# Altium PCB Conzult.PcbDoc
Units mil, origin at the board's own origin, x right, y up, seen from the top; angles counter-clockwise.
Board outline 2500 x 1062.99 mil, 2 copper layers ([1] Top Layer, [4] Bottom), stack 62.4 mil thick; 45 components, 27 nets, 158 pads, 38 vias.
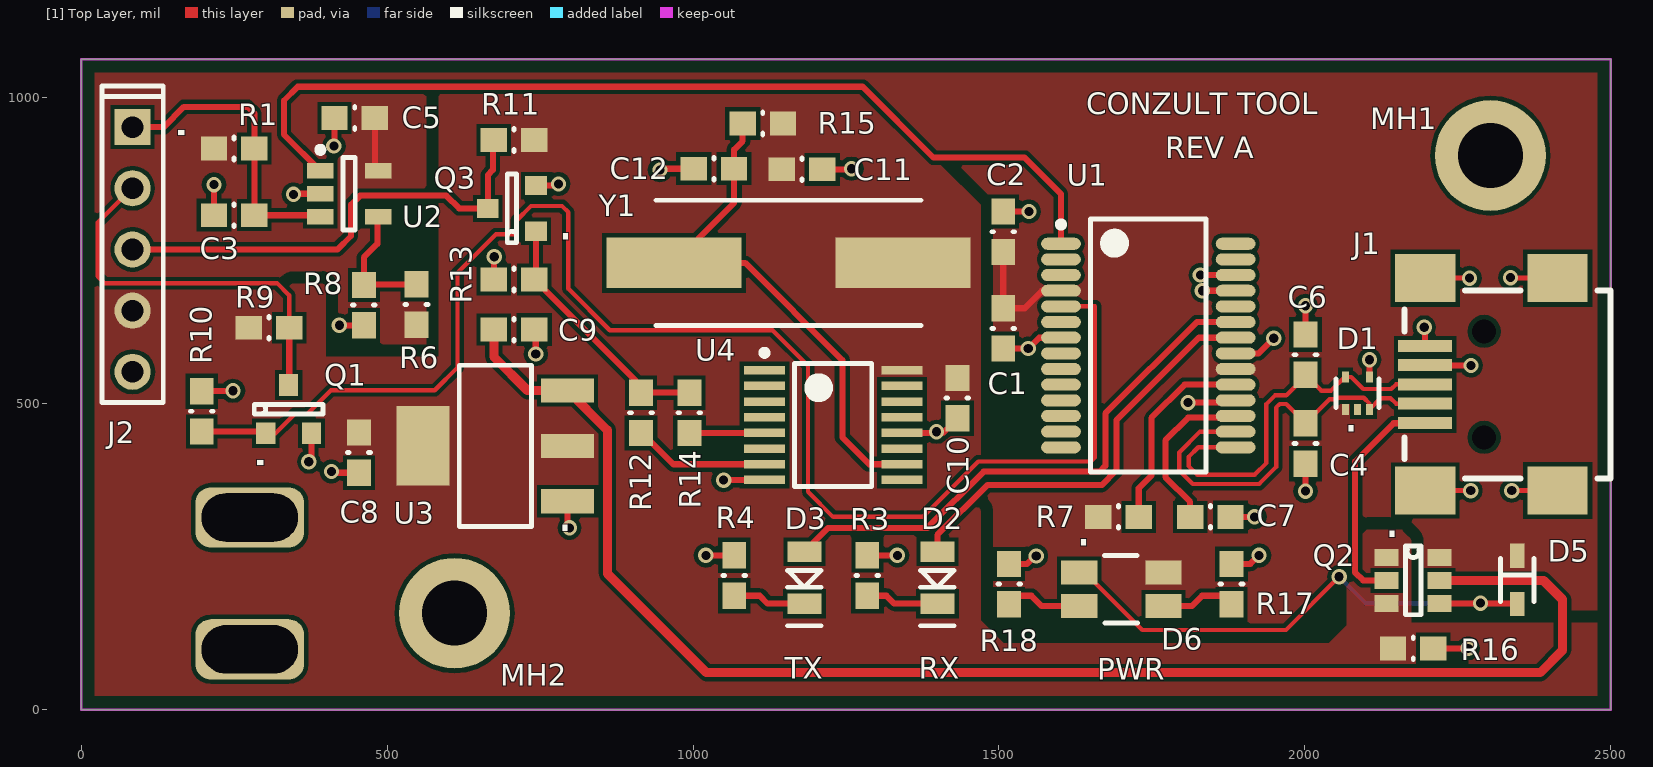
[diagram p0: [1] Top Layer view]
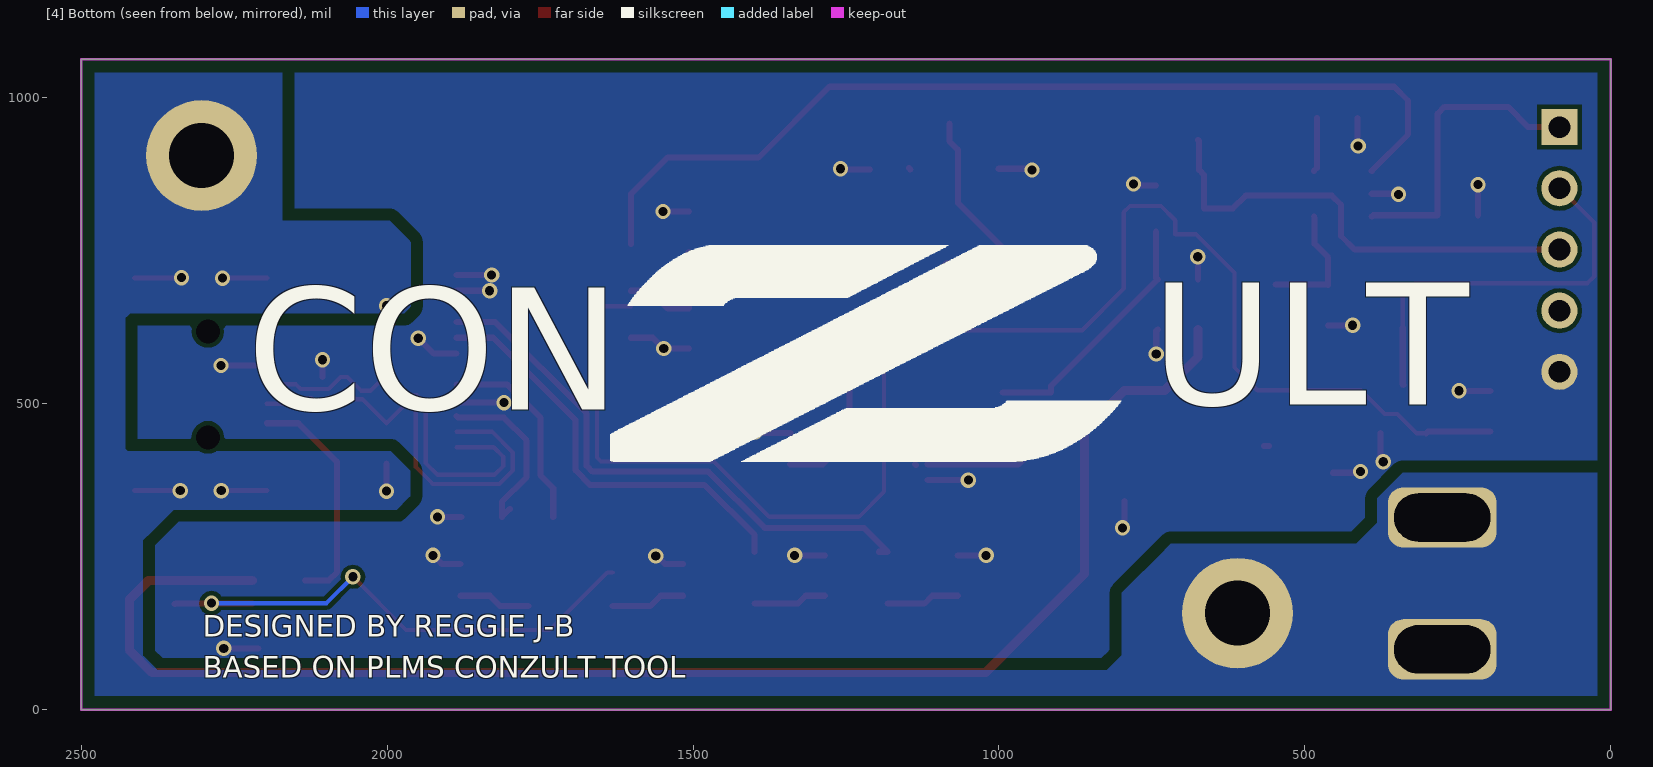
[diagram p1: [4] Bottom view, seen from below]

## Layer stack, top to bottom
Top Solder: solder mask 0.5, Solder Resist, Dk 3.5
[1] Top Layer: signal copper 1.7
Dielectric 1: core 59, FR-4, Dk 4.8
[4] Bottom: signal copper 1.7
Bottom Solder: solder mask 0.5, Solder Resist, Dk 3.5

## Board outline
0,0 2500,0 2500,1062.99 0,1062.99

## Design rules (kind name [scope] priority, off if disabled: settings)
Clearance Clearance_Poly [InPolygon vs InPolygon] p1: gap=20
Clearance Clearance_Board_Edge [OnLayer('Keep-Out Layer')] p2: gap=20
Clearance Clearance_FTDI [InComponent('U1') vs InComponent('U1')] p3: gap=5
Clearance Clearance_ESD [InComponent('D1') vs InComponent('D1')] p4: gap=5
Clearance [All] p5: gap=7
DiffPairsRouting [All] p1: maxlimit=7 minlimit=7 mostfreqgap=7 toplayer_minwidth=7 toplayer_maxwidth=7 toplayer_prefwidth=7 bottomlayer_minwidth=7 bottomlayer_maxwidth=7 bottomlayer_prefwidth=7 maxuncoupledlength=500
HoleSize [All] p1: absolutevalues=TRUE maxlimit=150 minlimit=1 maxpercent=80.000 minpercent=20.000
MinimumSolderMaskSliver [All] p1: minsoldermaskwidth=3.5
PlaneConnect [All] p1: planeconnectstyle=Direct reliefexpansion=20 reliefentries=4 reliefconductorwidth=10 reliefairgap=10
PolygonConnect PolygonConnect_CHGND [InNet(CHGND)] p1: connectstyle=Direct reliefconductorwidth=10 reliefentries=4 polygonreliefangle="90 Angle" airgapwidth=10
PolygonConnect [All] p2: connectstyle=Relief reliefconductorwidth=10 reliefentries=4 polygonreliefangle="90 Angle" airgapwidth=10
RoutingVias [All] p1: holewidth=15 width=25 viastyle="Through Hole" minholewidth=10 minwidth=20 maxholewidth=20 maxwidth=30
SilkToSilkClearance [All] p1: silktosilkclearance=8
SilkToSolderMaskClearance [IsPad] p1: minsilkscreentomaskgap=5 clearancetoexposedcopper=TRUE
SolderMaskExpansion SolderMaskExpansion_via [IsVia] p1: expansion=-1
SolderMaskExpansion [All] p2: expansion=4
UnpouredPolygon [All] p1: allowunpoured=FALSE
Width [All] p1: maxlimit=15 minlimit=7 preferedwidth=10
23 further rules are at their usual default settings.

## Classes and differential pairs
net class PWR: +5V-LDO CGND V-BUS V_IGN V_LOAD
differential pair USB: +USB_P -USB_N

## Components (designator, comment, footprint, x,y, rotation, side; value= is the part's Value field where it differs from the comment)
C1 "0.1uF" 0603 1507,623 r90 top
C2 "0.1uF" 0603 1507,781 r270 top
C3 "100pF" 0603 250,808 r0 top
C4 "1000pF" 0603 2001,435 r270 top
C5 "0.1uF" 0603 447,967 r0 top
C6 "1000pF" 0603 2001,580 r270 top
C7 "0.1uF" 0603 1845.5,315 r180 top
C8 "0.1uF" 0603 454,420 r90 top
C9 "10uF" 0603 707.47,621 r180 top
C10 "0.1uF" 0603 1432,509 r90 top
C11 "22pF" 0603 1178,883 r180 top
C12 "22pF" 0603 1034,884 r0 top
D1 "TPD2E001DRLRG4" SOT-533 2086,517 r0 top
D2 "Red" "LED 0805" 1399.4,215.62 r270 top
D3 "Red" "LED 0805" 1182,215.62 r270 top
D5 "B0540WS-7" SOD-323 2347,212 r270 top
D6 "LTST-C155KGJRKT" "LED DUAL 1210" 1700.1,196.61 r0 top
J1 "1-1734328-1" USB_MINI_AB_SMT_POSTS 2293,531.5 r90 top locked
J2 "67997-210HLF" HDR5X1PTH2.54MM 84,752 r270 top
MH1 "MB800-0024" "Mount Hole M2.5" 2303.15,905.51 r0 top locked
MH2 "MB800-0024" "Mount Hole M2.5" 610.24,157.48 r0 top
Q1 "FDV301N" SOT-23-3 339,491 r0 top
Q2 "DMG6602SVT-7" SOT-23-6L 2177,211 r0 top
Q3 "FDV301N" SOT-23-3 703.96,819 r90 top
R1 "10K" 0603 250,917 r0 top
R3 "1.00K" 0603 1284.8,219 r90 top
R4 "1.00K" 0603 1067.4,219 r90 top
R6 "10K" 0603 548,662 r90 top
R7 "10K" 0603 1695.5,315 r180 top
R8 "4.70K" 0603 462,661 r270 top
R9 "10K" 0603 307,624 r0 top
R10 "10K" 0603 197,487.49 r90 top
R11 "10K" 0603 707.47,931 r180 top
R12 "0" 0603 915,485 r90 top
R13 "10K" 0603 707.47,703 r180 top
R14 "0" 0603 994,485 r90 top
R15 "10.0M" 0603 1114,958 r180 top
R16 "10K" 0603 2177,100 r0 top
R17 "1.00K" 0603 1880,205 r90 top
R18 "1.00K" 0603 1516.6,205 r90 top
U1 "FT232RL" SSOP-28 1744,595 r0 top
U2 "MCP6L01T-E/OT" SOT-23-5 438,843 r0 top
U3 "LD1117S50CTR" SOT-223-3 677,431 r180 top
U4 "CD4060BPWR" TSSOP16 1229,465 r0 top
Y1 "4.9152Mhz" HC49/US 1156,730 r0 top

## Footprints (in the part's own frame and the unit in brackets; to place one, negate y for a bottom-side part, rotate by r counter-clockwise, add the part's x,y. Pads: shape width x height; smd on the part's side, far side on the other; paste and mask are expansions set on the pad)
0603 [mil] "Chip Resistor, 2-Leads, Body 1.6x0.8mm, IPC Medium Density"
  rect 43x39 smd: 1(-33,0) 2(33,0)
  silkscreen extent 0,-19 0,19, body extent -34,-16 34,16, height 33
HC49/US [mm] "HC49/US Crystal, 11.40mm x 4.70mm"
  rect 5.6x2.1 smd: 1(4.75,0) 2(-4.75,0)
  silkscreen extent -5.5,-2.6 5.5,2.6, body extent -6.35,-2.35 6.35,2.35, height 4.16
HDR5X1PTH2.54MM [mm] "header male 5x1 vertical 2.54MM"
  rect 1.5x1.5 hole 0.9: 1(-5.08,0)
  round 1.5 hole 0.9: 2(-2.54,0) 3(0,0) 4(2.54,0) 5(5.08,0)
  silkscreen extent -6.78,-1.27 6.35,1.27, body extent -6.35,-1.25 6.35,1.25, height 8.55
"LED 0805" [mm] "Chip LED, 2-Leads, Body 2.0x1.3mm, IPC Medium Density"
  rect 0.85x1.4 smd: 1(-1.075,0) 2(1.075,0)
  silkscreen extent -0.3,-0.7 2,0.7, body extent -1.01,-0.62 1.01,0.63, height 1.1
"LED DUAL 1210" [mm] "1210 Dual LED"
  rect 1.5x1 smd: 1(-1.75,0.7) 2(-1.75,-0.7) 3(1.75,0.7) 4(1.75,-0.7)
  silkscreen extent -0.7,-1.4 0.67,1.4, body extent -1.6,-1.35 1.6,1.35, height 1.1
"Mount Hole M2.5" [mm] "M2.5 Plated Mount Hole"
  round 4.6 hole 2.7: 0(0,0)
SOD-323 [mm] "Molded Diode, 2-Leads, Body 1.7x1.3mm, IPC Medium Density"
  rect 1x0.6 smd: 1(1,0) 2(-1,0)
  silkscreen extent -0.9,-0.7 0.9,0.7, body extent -1.35,-0.62 1.35,0.63, height 1.1
SOT-23-3 [mm] "Also TO-236AB"
  rect 0.8x0.9 smd: 1(-0.95,-1) 2(0.95,-1) 3(0,1)
  silkscreen extent -1.43,-0.2 1.43,0.2, body extent -1.46,-1.25 1.46,1.23, height 1.01
SOT-23-5 [mm] "SOT23, 5-Leads, Body 2.9x1.6mm, Pitch 0.95mm, Lead Span 2.8mm, IPC Medium Density"
  rect 1.1x0.65 smd: 1(-1.2,0.95) 2(-1.2,0) 3(-1.2,-0.95) 4(1.2,-0.95) 5(1.2,0.95)
  silkscreen extent -1.32,-1.5 0.25,1.95, body extent -1.5,-1.5 1.5,1.5, height 1.44
SOT-23-6L [mm] "Thin SOT-26 or also called TSOT-23-6L"
  rect 1x0.7 smd: 1(-1.1,0.95) 2(-1.1,0) 3(-1.1,-0.95) 4(1.099,-0.95) 5(1.099,0) 6(1.099,0.95)
  silkscreen extent -0.33,-1.43 0.33,1.43, body extent -1.41,-1.45 1.41,1.45, height 0.98
SOT-223-3 [mm] "SOT223, 4-Leads, Body 6.7x7.3mm (max), Pitch 2.30mm, IPC Medium Density"
  rect 2.2x1 smd: 1(-3,2.3) 2(-3,-2.3) 3(-3,0)
  rect 2.2x3.3 smd: 3(3,0)
  silkscreen extent -1.5,-3.35 1.5,3.35, body extent -1.85,-3.35 1.85,3.35, height 1.8
SOT-533 [mm] "Plastic Small Outline 5-Pin, 0.5mm pitch 1.3mm x 1.7mm x 0.6mm"
  rect 0.3x0.45 smd mask+0.05: 1(-0.5,-0.675) 2(0,-0.675) 3(0.5,-0.675) 4(0.5,0.675) 5(-0.5,0.675)
  silkscreen extent -0.9,-0.6 0.9,0.6, body extent -0.85,-0.85 0.85,0.85, height 0.55
SSOP-28 [mm] "SSOP, 28-Leads, Body 10.20x5.30mm, Pitch 0.65mm, IPC Medium Density"
  oval 1.65x0.5 smd: 1(-3.625,4.225) 2(-3.625,3.575) 3(-3.625,2.925) 4(-3.625,2.275) 5(-3.625,1.625) 6(-3.625,0.975) 7(-3.625,0.325) 8(-3.625,-0.325) 9(-3.625,-0.975) 10(-3.625,-1.625) 11(-3.625,-2.275) 12(-3.625,-2.925) 13(-3.625,-3.575) 14(-3.625,-4.225) 15(3.625,-4.225) 16(3.625,-3.575) 17(3.625,-2.925) 18(3.625,-2.275) 19(3.625,-1.625) 20(3.625,-0.975) 21(3.625,-0.325) 22(3.625,0.325) 23(3.625,0.975) 24(3.625,1.625) 25(3.625,2.275) 26(3.625,2.925) 27(3.625,3.575) 28(3.625,4.225)
  silkscreen extent -3.75,-5.25 2.4,5.25, body extent -2.8,-5.25 2.8,5.25, height 2
TSSOP16 [mm] "TSOP, 16-Leads, Body 5x4.4mm, Pitch 0.65mm, IPC Medium Density"
  rect 1.7x0.35 smd: 1(-2.85,2.275) 2(-2.85,1.625) 3(-2.85,0.975) 4(-2.85,0.325) 5(-2.85,-0.325) 6(-2.85,-0.975) 7(-2.85,-1.625) 8(-2.85,-2.275) 9(2.85,-2.275) 10(2.85,-1.625) 11(2.85,-0.975) 12(2.85,-0.325) 13(2.85,0.325) 14(2.85,0.975) 15(2.85,1.625) 16(2.85,2.275)
  silkscreen extent -2.97,-2.55 1.6,3.12, body extent -3.21,-2.5 3.21,2.5, height 0.98
USB_MINI_AB_SMT_POSTS [mm] "USB Mini-AB connector, SMT signal pads with PTH alignment posts"
  rect 0.5x2.25 smd: 1(-1.6,2.45) 2(-0.8,2.45) 3(0,2.45) 4(0.8,2.45) 5(1.6,2.45)
  round 0 hole 1 unplated: H1(-2.2,0) H2(2.2,0)
  rect 2x2.5 smd: M1(-4.41,2.45) M2(-4.41,-3.05) M3(4.41,-3.05) M4(4.41,2.45)
  silkscreen extent -3.9,-5.25 3.9,3.3, body extent -4.95,-5.92 4.95,3.28, height 4.14

## Part data
C1 C2 C5 C7 C8 C10: library part MB200-0058, "Ceramic Capacitor 0.1uF 50V +/-10% X7R SMT-0603"
C3: library part MB200-0022, "Ceramic Capacitor 100pF 50V +/-5% C0G SMT-0603"
C4 C6: library part C0603C102J5RACTU, "Ceramic Capacitor 1000pF 50V +/-5% X7R SMT-0603"
C9: library part GRM188R60J106ME47J, "Ceramic Capacitor 10uF 6.3V +/-20% X5R SMT-0603"
C11 C12: library part MB200-0014, "Ceramic Capacitor 22pF 50V +/-5% C0G SMT-0603"
D1: "Array Diode Vclamp = VCC+25V @ 10A SOT-5"
D2 D3: library part 598-8110-107F, "Red LED, 2.2V @ 20mA, 40mcd, 0805"
D5: "Schottky Diode 0.285 @ 10mA SOD-323"
D6: "Bicolor LED, Red/Green, 2V @20mA, 35/45mcd, 1210"
J1: "USB 2.0 Mini-AB Connector w/PTH Alignment Posts"
J2: "header male 5x1 vertical 2.54MM"
MH1 MH2: "Mounting Hole for M2.5 Screw"
Q1 Q3: "MOSFET, N-CH, 25Vds, 0.22A Id, 0.35W, SOT-23-3"
Q2: "MOSFET, Dual N /P Channel, +/-30Vds, 3.4A/-2.7A Id, 0.84W, SOT-23-6L"
R1 R6 R7 R9 R10 R11 R13 R16: library part MB100-0457, "Resistor 10K 1% 1/10W SMT-0603"
R3 R4 R17 R18: library part MB100-0343, "Resistor 1.00K 1% 1/10W SMT-0603"
R8: library part MB100-0419, "Resistor 4.70K 1% 1/10W SMT-0603"
R12 R14: library part CRCW06030000Z0EA, "Resistor 0 1% 1/10W SMT-0603"
R15: library part MB100-0799, "Resistor 10.0M 1% 1/10W SMT-0603"
U1: "Bridge, USB to UART"
U2: "Single General Purpose Rail-to-rail Opamp, 1MHz GBP, 0.6V/uS"
U3: "IC REG LDO 5V 0.8A SOT223"
U4: "IC BNRY COUNTR/DIV 14STG 16TSSOP"
Y1: library part ATS042SM-1, "Crystal 8MHz HC49/US 11.4mmx4.7 mm 30ppm"

## Free pads (board coordinates)
  rrect50% 177.17x98.43 hole 78.74 slot 157.48 at 0 deg: 0(275.59,98.43) 0(275.59,314)

## Via types
v1: diameter 25, hole 15, [1] Top Layer to [4] Bottom, tented both sides, 38 vias

## Nets (pads, with @x,y where several pads share a name; then routed paths per layer and width w, separated by ;. In a path a pad name is that pad's centre, name@x,y a point inside that pad or via, vN(x,y) a via of type N, cw(c..) or ccw(c..) an arc to the next point about the centre after c; other vN are vias at no path point)
+5V-LDO: C9.2 Q2.5 U3.2 | length 2453.7
  [1] Top Layer w15: C9.2 674.47,576.53 729.45,521.55 U3.2 860,456.66 860,222.47 1022,60.47 2384.47,60.47 2421,97 2421,180 2390,211 Q2.5
CGND: C4.2 C6.1 J1.M1 J1.M2 J1.M3 J1.M4 MH1.0 MH2.0 pad.0 | length 391.6
  [1] Top Layer w8: J1.M1 v1(2271.13,357.87) ; J1.M4 v1(2269.12,705.12) ; v1(2336,706) 2336.88,705.12 J1.M3 ; v1(2338.13,357.87) J1.M2
  [1] Top Layer w10: v1(2001,357) C4.2 ; C6.1 v1(2001,660)
GND: C1.1 C2.1 C3.1 C5.1 C7.1 C8.1 C9.1 C10.1 C11.1 C12.1 D1.4 J1.4 J1.5 J2.5 Q1.2 Q3.2 R3.2 R4.2 R8.2 R10.2 R13.2 R16.2 R17.2 R18.2 U1.7 U1.18 U1.21 U1.25 U1.26 U2.2 U3.1 U4.8 U4.12 | length 1593.8
  [1] Top Layer w10: R10.2 247.49,520.49 v1(248,521) ; C3.1 v1(217,858) ; v1(347,842) 348,843 U2.2 ; v1(372,405) 376.4,409.4 Q1.2 ; v1(409,389) 411,387 C8.1 ; v1(413,921) 414,922 C5.1 ; v1(422,628) R8.2 ; R13.2 675,703.53 v1(675,740) ; C9.1 743,618.47 v1(743,581) ; Q3.2 777.4,856.4 v1(780,859) ; U3.1 795.11,299.89 v1(798,297) ; v1(946,882) 948,884 C12.1 ; v1(1021,252) R4.2 ; v1(1050,375) 1050.43,375.43 U4.8 ; C11.1 1258,883 v1(1259,884) ; R3.2 v1(1334,252) ; U4.12 1389.8,452.2 1390,452 1408,452 C10.1 ; C1.1 v1(1548,590) 1565.8,607.8 U1.7 ; C2.1 v1(1549,814) ; R18.2 1546,238 1560,252 v1(1561,251) ; v1(1809,501.68) 1882.97,501.68 U1.18 ; v1(1829.16,710.16) U1.26 ; v1(1832.43,684.57) U1.25 ; C7.1 v1(1917.5,315) ; R17.2 1911,238 v1(1925,252) ; U1.21 1924.2,582.2 v1(1949,607) ; D1.4 v1(2105.69,571.68) ; v1(2195,625) 2196.54,623.46 J1.5@2196.54,593.99 ; J1.4@2196.54,562.5 v1(2271.5,562.5) ; R16.2 v1(2267,100)
  other v1: 1398,454
NetC7_2: C7.2 U1.17 | length 291.4
  [1] Top Layer w10: C7.2@1799.5,328 C7.2 1812.5,339.5 1772,380 1772,440 1809.19,477.18 1884.06,477.18 U1.17
NetC12_2: C12.2 R15.2 U4.10 Y1.2 | length 856.7
  [1] Top Layer w10: R15.2 1081,929 1067,915 C12.2 1067,828.01 Y1.2 1085,730 1243.98,571.02 1243.98,445.05 1288,401.02 U4.10
NetD2_2: D2.2 R3.1 | length 119.9
  [1] Top Layer w10: R3.1 1316,186 1328.7,173.3 D2.2
NetD3_2: D3.2 R4.1 | length 119.9
  [1] Top Layer w10: R4.1 1109,186 1121.7,173.3 D3.2
NetD6_2: D6.2 R18.1 | length 121.6
  [1] Top Layer w10: R18.1@1516.6,186 1553,186 1569.95,169.05 D6.2
NetD6_4: D6.4 R17.1 | length 118
  [1] Top Layer w10: D6.4 1815.05,169.05 1832,186 R17.1@1880,186
NetJ2_3: J2.3 Q3.3 R11.2 | length 781.7
  [1] Top Layer w10: J2.3@74,752 419,752 441,774 441,825 456,840 597,840 618,819 Q3.3 664.59,873.59 673,882 673,929.53 R11.2
NetQ1_1: Q1.1 R10.1 U1.5 | length 2466.5
  [1] Top Layer w7: Q1.1 317.63,451.63 349.15,483.15 369.49,483.15 408.33,522 578,522 615,559 615,714 677.81,776.81 711.81,776.81 711.81,799.8 735,823 786,823 796,813 796,688 864,620 1130,620 1188,562 1188,356 1229,315 1375.54,315 1466.04,405.5 1650.5,405.5 1657.02,412.02 1657.02,658.98 U1.5
  [1] Top Layer w10: R10.1 298.74,454.49 Q1.1
NetQ3_1: Q3.1 R12.2 R13.1 R14.2 | length 412.2
  [1] Top Layer w10: R13.1 915,528.47 R12.2 R14.2 ; R13.1@743.33,705.67 Q3.1
NetR7_1: R7.1 U1.19 | length 330.2
  [1] Top Layer w10: R7.1 1728.5,361.76 1749.25,382.51 1749.25,476.59 1803.69,531.02 U1.19
NetR12_1: R12.1 U4.7 | length 239.3
  [1] Top Layer w10: R12.1@905,464 967.98,401.02 U4.7 ; U4.7@1135.77,400 U4.7@1136.8,401.02
NetR14_1: R14.1 U4.5 | length 122.9
  [1] Top Layer w10: R14.1 1116.59,452 U4.5
NetU1_1: U1.1 U2.1 | length 1572.8
  [1] Top Layer w10: U2.1 331.47,939.69 331.47,995.47 354,1018 1277,1018 1393,902 1542,902 1601.28,842.72 U1.1
ODB-RX: J2.2 Q1.3 R9.2 | length 640.1
  [1] Top Layer w7: J2.2@83,852 26.97,795.97 26.97,708.03 38,697 320,697 340,677 R9.2
  [1] Top Layer w10: Q1.3 340,531.37 R9.2
ODB-TX: C3.2 J2.1 R1.2 U2.3 | length 502
  [1] Top Layer w10: J2.1@74,952 135,952 168,985 272,985 283,974 R1.2 C3.2 388.35,808 U2.3
RX_LED: D2.1 U1.22 | length 696.4
  [1] Top Layer w10: D2.1 1399.4,285.4 1481,367 1668,367 1692,391 1692,473 1826.8,607.8 U1.22
THRESHOLD: R6.2 R8.1 U2.4 | length 207.6
  [1] Top Layer w10: U2.4 484,804.35 484,761 462,739 R8.1 463,695 R6.2
TX_LED: D3.1 U1.23 | length 924.3
  [1] Top Layer w10: D3.1@1195.94,257.94 D3.1 1221.06,297 1383,297 1475,389 1664.54,389 1674,398.46 1674,484 1823.39,633.39 U1.23
USB_N: C4.1 D1.3 J1.2 U1.16 | length 713.3
  [1] Top Layer w7: U1.16 1828.62,454.25 1794.59,420.21 1794.59,390.79 1816.79,368.59 1925.21,368.59 1953,396.37 1953,493.5 1959,499.5 1969.5,499.5 C4.1 2040.18,507.18 2051.34,507.18 2053.94,509.78 2096.25,509.78 2105.69,500.35 D1.3 2124.01,508.75 2140,508.75 2148.75,500 J1.2
USB_P: C6.2 D1.5 J1.3 U1.15 | length 647
  [1] Top Layer w7: U1.15 1825.66,428.66 1810,413 1810,398 1824,384 1918,384 1937,403 1937,499.3 1951.2,513.5 1969.5,513.5 1997.5,541.5 1997.5,543.5 C6.2 2026.76,521.24 2042.76,521.24 2065.1,543.57 D1.5 2075.72,543.57 2095.51,523.78 2141.04,523.78 2148.75,531.5 J1.3
V-BUS: J1.1 Q2.2 | length 378.7
  [1] Top Layer w10: Q2.2 2095,211 2082,224 2082,249 2082,405 2145.01,468.01 J1.1@2196.54,468.01
V_BUS_LED: D5.1 D6.1 Q2.4 | length 875.8
  [1] Top Layer w7: D6.1 1640.15,224.16 1734.31,130 1969,130 v1(2056,217)
  [1] Top Layer w10: Q2.4 2346.03,173.6 D5.1
  [4] Bottom w7: v1(2056,217) 2099,174 v1(2287,174)
V_IGN: C8.2 C10.2 C11.2 J2.4 Q2.1 Q2.3 R9.1 R11.1 R15.1 R16.1 U3.3 U4.16 Y1.1 | length 59.9
  [1] Top Layer w10: U3.3@558.89,431 U3.3@567,431 ; C11.2 C11.2@1147,885 ; Y1.1@1298,730 Y1.1 ; U4.16 U4.16@1343.01,556.37 ; C10.2@1431,541 C10.2
V_LOAD: C1.2 C2.2 C5.2 D1.1 D5.2 D6.3 Q2.6 R1.1 R6.1 R7.2 U1.4 U1.20 U2.5 | length 286.9
  [1] Top Layer w10: C5.2 480,885.65 U2.5 ; C2.2 C1.2 1542,656 1570.57,684.57 U1.4
pads on no net: D1.2 J1.H1 J1.H2 U1.2 U1.3 U1.6 U1.8 U1.9 U1.10 U1.11 U1.12 U1.13 U1.14 U1.24 U1.27 U1.28 U4.1 U4.2 U4.3 U4.4 U4.6 U4.9 U4.11 U4.13 U4.14 U4.15

## Polygon pours and split planes (outlines as drawn)
V_LOAD on [1] Top Layer "V_LOAD" (solid, remove dead copper, pour order 17): 0,1062.99 2500,1062.99 2500,0 1,0 1,1061.99 0,1062.99
V_IGN on [1] Top Layer "V_IGN" (solid, pour order 15): 0,696 400,696 400,577 584,577 584,1021 1274,1021 1470,825 1470,521 1470,306 1470,150 1470,146 1508,108 2039,108 2068.75,137.75 2068.75,259.02 2068.75,261.75 2101,294 2159,294 2159,293 2166,286 2174,278 2174,142 2500,142 2500,0 0,0
GND on [4] Bottom "GND" (solid, pour order 21): 2500,1062.99 2500,0 0,0 0,1062.99 2500,1062.99
CGND on [4] Bottom "C_GND" (solid, remove dead copper, pour order 19): 0,387 294,387 340,387 382,345 382,305 415,272 416,271 718,271 719,271 739,251 788,202 799,191 799,92 799,89 808,80 824,64 1103,64 2375,64 2398,87 2399,88 2399,243 2399,277 2385,291 2349,327 2035,327 1984,327 1966,345 1962,349 1962,387 1962,390 1978,406 1994,422 2424,422 2428,426 2428,598 2428,640 2425,643 2420,648 2059,648 1972,648 1965,655 1961,659 1961,747 1961,764 1964,767 1996,799 2171,799 2171,1063 2499.99,1063 2500,1062.99 2500,0 0,0 0,387

## Keep-outs
Keep-Out Layer:
  the board outline again, w3.94

## Silkscreen, mask and mechanical layers (free items; w line width, h text height)
Top Overlay:
  text "CONZULT TOOL" at 1643,973 h35
  text "REV A" at 1772,901 h35
  text "TX" at 1150,50 h35
  text "RX" at 1369,50 h35
  text "PWR" at 1661,49 h35
Bottom Overlay:
  drawing of 553 lines, arcs and shapes, not listed
  text "ULT" at 751,498 h200
  text "CON" at 2229,490 h200
  text "DESIGNED BY REGGIE J-B" at 2301,119 h35
  text "BASED ON PLMS CONZULT TOOL" at 2301,52 h35
[M1] Board Outline:
  the board outline again, w3.94
[M18] Impedance Control:
  text ".Layer_Name" at 4924.39,299.1 h60

## Dimensions
2501,0 to 2377.65,531.5 on [M2] Board Dimensions
0,0 to 0,1062.99 on [M2] Board Dimensions
0,0 to 2500,0 on [M2] Board Dimensions
2500,0 to 2303.15,905.51 on [M2] Board Dimensions
2303.15,905.51 to 2500,1062.99 on [M2] Board Dimensions
2303.15,905.51 to 2500,1062.99 on [M2] Board Dimensions
610.24,157.48 to 0,0 on [M2] Board Dimensions
0,0 to 610.24,157.48 on [M2] Board Dimensions
0,0 to 275.59,98.43 on [M2] Board Dimensions
275.59,98.43 to 0,0 on [M2] Board Dimensions
275.59,314 to 0,0 on [M2] Board Dimensions